# EAGLE board ESP12E Breakout Adapter (EAGLE 7.2.0)
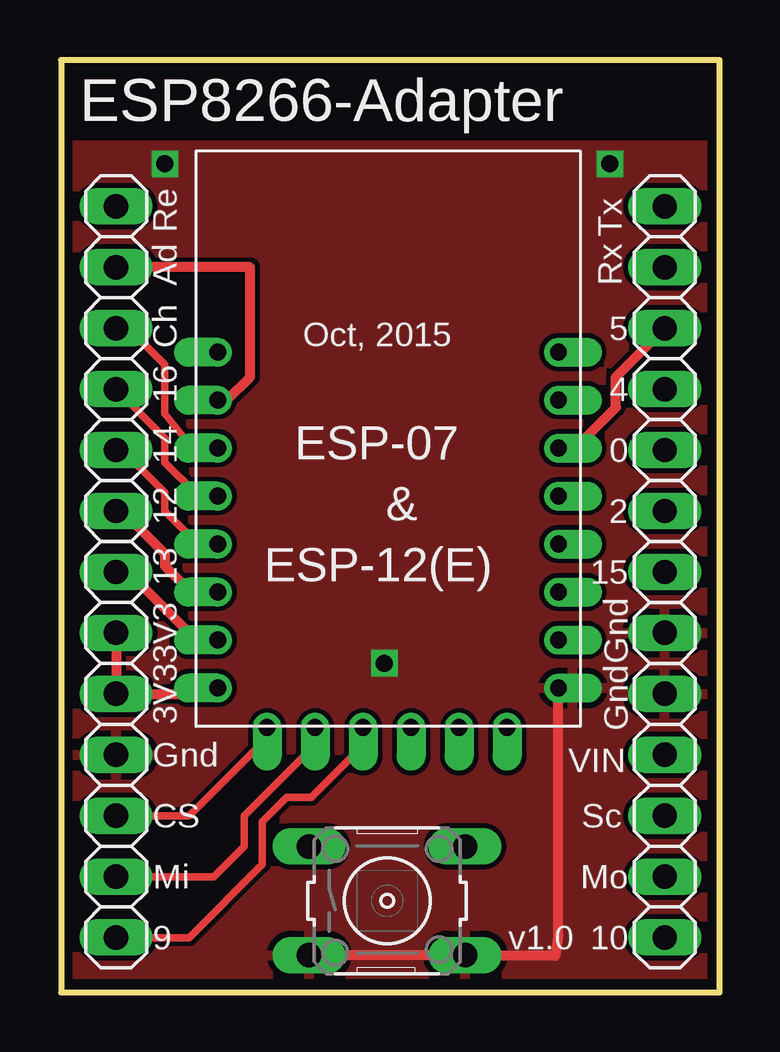
[diagram p0: board, top side]
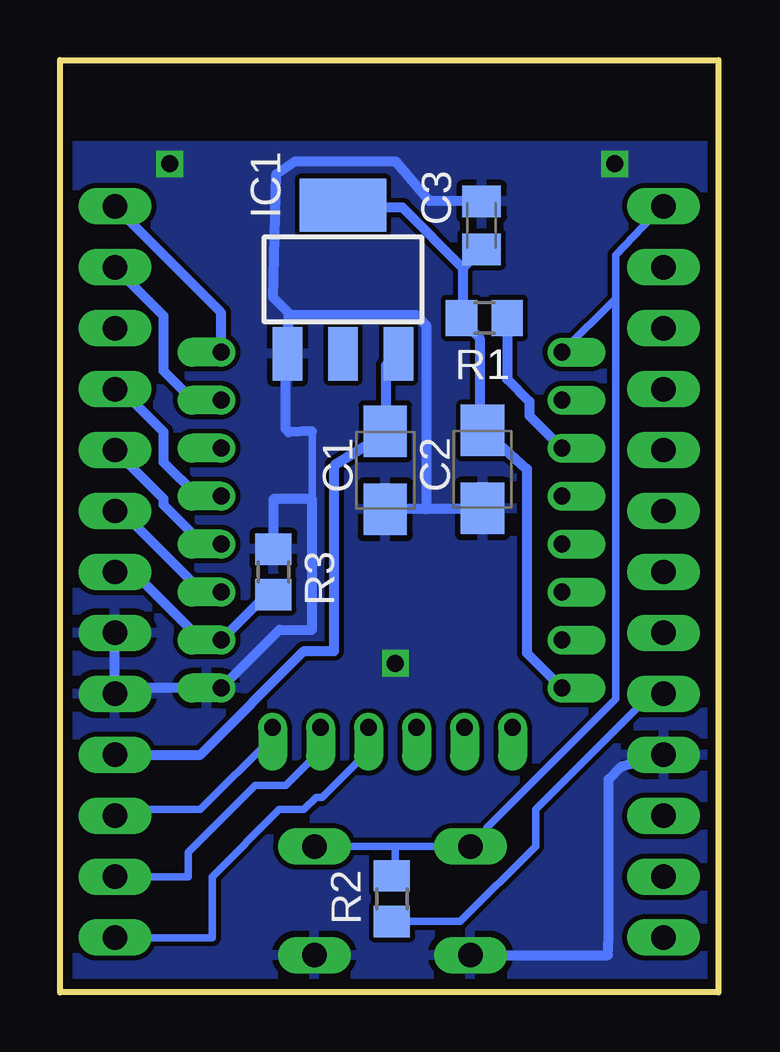
[diagram p1: board, bottom side, seen from below]

Size 27.48 x 38.83 mm. Coordinates in mm from the lower left corner, seen from the top.
Outline: 0,0 27.48,0 27.48,38.83 0,38.83 0,0
Copper layers (1*16): Top 0.035mm / dielectric 1.5mm / Bottom 0.035mm
Design rules "default *": minimum track width 10mil, minimum drill 24mil, track to track 8mil, track to pad 8mil, pad to pad 8mil, via to via 8mil, smd to smd 8mil, copper to edge 20mil, drill to drill 8mil, minimum pad ring 10mil, minimum via ring 8mil, stop-mask expansion 4mil, vias tented up to drill 0mil, thermal gap 10mil
Net classes: 1 a: width 0.203 mm, drill 0.305 mm, clearance 0.203 mm
Milling: 4 lines

## Footprints (pad centres in the part's own frame; a part is rotated, then mirrored left to right if it is on the bottom)
B/3528-21W = smd 2.15 x 1.8: + 1.625,0; - -1.625,0
C0805K = smd 1.3 x 1.6: 1 -1,0; 2 1,0
ESP-12-E = drill 0.7 offset: ADC -7.2,3.8; CH_PD -7.2,1.8; CS0 -5.14,-9.838; GND 7,-8.2; GPIO0 7,-2.2; GPIO2 7,-4.2; GPIO4 7,1.8; GPIO5 7,-0.2; GPIO9 -1.14,-9.838; GPIO10 0.86,-9.838; GPIO12 -7.2,-4.2; GPIO13 -7.2,-6.2; GPIO14 -7.2,-2.2; GPIO15 7,-6.2; GPIO16 -7.2,-0.2; MISO -3.14,-9.838; MOSI 2.86,-9.838; RESET -7.2,5.8; RX 7,3.8; SCLK 4.86,-9.838; TX 7,5.8; VCC -7.2,-8.2
SOT223 = smd 1.219 x 2.235: 1 -2.311,-3.099; 2 0,-3.099; 3 2.311,-3.099 | smd 3.6 x 2.2: TAB 0,3.099
1X13 = drill 1.016 long: 1 -15.24,0; 2 -12.7,0; 3 -10.16,0; 4 -7.62,0; 5 -5.08,0; 6 -2.54,0; 7 0,0; 8 2.54,0; 9 5.08,0; 10 7.62,0; 11 10.16,0; 12 12.7,0; 13 15.24,0
R0805 = smd 1.3 x 1.5: 1 -0.95,0; 2 0.95,0
B3F-10XX = drill 1.016 long: 1 -3.251,2.261; 2 3.251,2.261; 3 -3.251,-2.261; 4 3.251,-2.261

## Placement (x,y rotation side)
C1  10µF  [B/3528-21W]  13.93,21.73 90 bottom
C2  10µF  [B/3528-21W]  9.88,21.77 90 bottom
C3  100nF  [C0805K]  9.92,31.94 90 bottom
ESP8266  ESP-07 & 12(E)  [ESP-12-E]  13.77,20.85 0 top
IC1  LM1117-3.3  [SOT223]  15.69,29.69 0 bottom
JP3  [1X13]  2.34,17.49 270 top
JP4  [1X13]  25.2,17.49 270 top
R1  0 Ohm  [R0805]  9.8,28.08 0 bottom
R2  10KOhm  [R0805]  13.66,3.87 270 bottom
R3  10KOhm  [R0805]  18.59,17.49 270 bottom
RESET_SWITCH  RESET  [B3F-10XX]  13.63,3.78 0 top

## Library data of the parts
C1-C3 R1-R3 = rcl
ESP8266 = johs_esp8266_lib_frank_esp12e_mod; DIMENSIONS: 24.0 x 16.0 mm; PINS: 22; PITCH: 0.078" / 2 mm
IC1 = lm1117
JP3 JP4 = pinhead
RESET_SWITCH = switch-omron; MPN: B3F-1000; OC_FARNELL: 176432; OC_NEWARK: 36M3542

## Nets
ADC: ESP8266.ADC JP3.2
CH_PD: ESP8266.CH_PD JP3.3 R1.2
CS0: ESP8266.CS0 JP3.11
GND [a]: C1.- C2.- C3.2 ESP8266.GND IC1.1 JP3.10 JP4.8 JP4.9 R3.1 RESET_SWITCH.3 RESET_SWITCH.4
GPIO0: ESP8266.GPIO0 JP4.5
GPIO2: ESP8266.GPIO2 JP4.6
GPIO4: ESP8266.GPIO5 JP4.4
GPIO5: ESP8266.GPIO4 JP4.3
GPIO9: ESP8266.GPIO9 JP3.13
GPIO10: ESP8266.GPIO10 JP4.13
GPIO12: ESP8266.GPIO12 JP3.6
GPIO13: ESP8266.GPIO13 JP3.7
GPIO14: ESP8266.GPIO14 JP3.5
GPIO15: ESP8266.GPIO15 JP4.7 R3.2
GPIO16: ESP8266.GPIO16 JP3.4
MISO: ESP8266.MISO JP3.12
MOSI: ESP8266.MOSI JP4.12
RESET: ESP8266.RESET JP3.1 R2.1 RESET_SWITCH.1 RESET_SWITCH.2
RX: ESP8266.RX JP4.2
SCLK: ESP8266.SCLK JP4.11
TX: ESP8266.TX JP4.1
VCC: C2.+ C3.1 ESP8266.VCC IC1.TAB JP3.8 JP3.9 R1.1 R2.2
VIN: C1.+ IC1.3 JP4.10

## Tracks (layer width: path | path; a pad name or v marks a point on that pad's centre or on a via)
ADC
  Top 0.406: ESP8266.ADC 6.96,24.65 7.93,25.62 7.93,30.19 JP3.2
CH_PD
  Top 0.305: JP3.3 2.84,27.65 4.37,26.13 4.37,24.09 5.39,22.82 6.4,22.82 ESP8266.CH_PD
  Bottom 0.406: R1.2 8.85,25.53 7.93,24.6 7.93,24.01 ESP8266.CH_PD
CS0
  Top 0.305: ESP8266.CS0 8.63,10.57 5.39,7.33 JP3.11
GND  (via drill 0.7)
  Top 0.406: RESET_SWITCH.3 RESET_SWITCH.4 17.17,1.49 20.63,1.49 20.75,2.38 20.75,12.63 ESP8266.GND
  Bottom 0.305: 16.98,20.52 16.98,23.36
  Bottom 0.406: 12.23,20.11 10.41,20.11 10,20.52 C2.- | 12.23,20.11 13.91,20.11 C1.- | 18.1,23.46 18.1,26.53 IC1.1 17.96,26.67 17.96,28.21 | 17.96,28.21 17.96,28.28 18.59,28.92 18.47,34.08 17.68,34.61 13.51,34.61 12.12,32.96 10,32.96 C3.2 | 12.23,20.11 12.23,27.79 12.65,28.21 17.96,28.21 | 16.98,23.36 17.96,23.32 | JP3.10 4.11,9.36 4.62,8.85 4.62,2.25 4.66,1.52 RESET_SWITCH.3 | JP4.8 JP4.9 24.96,12.65 ESP8266.GND 18.34,15.08 16.98,15.08 16.98,20.52 18.59,20.52 R3.1
  other vias: 13.51,13.68 4.37,34.51 22.91,34.51
  pour Top: 0.31,0.22 27.23,0.22 27.23,35.27 0.31,35.27
  pour Bottom: 0.31,0.22 27.23,0.22 27.23,35.27 0.31,35.27
GPIO0
  Bottom 0.406: ESP8266.GPIO0 21.53,18.65 23.17,20.28 23.17,20.54 JP4.5
GPIO2
  Bottom 0.406: ESP8266.GPIO2 21.56,16.65 24.44,19.52 24.69,19.52 JP4.6
GPIO4
  Bottom 0.406: ESP8266.GPIO5 21.75,20.65 23.17,22.06 23.17,23.33 24.44,24.6 24.69,24.6 JP4.4
GPIO5
  Top 0.406: ESP8266.GPIO4 21.47,22.65 23.17,24.35 23.17,25.62 JP4.3
GPIO9
  Top 0.305: ESP8266.GPIO9 12.63,10.26 10.47,8.09 9.45,8.09 8.43,7.08 8.43,5.3 5.39,2.25 JP3.13
GPIO10
  Bottom 0.305: ESP8266.GPIO10 14.63,10.02 16.56,8.09 16.82,8.09 17.32,7.58 18.34,7.58 21.13,4.79 21.13,2.25 JP4.13
GPIO12
  Top 0.406: JP3.6 2.59,20.03 4.37,18.25 4.37,17.74 5.39,16.73 6.49,16.73 ESP8266.GPIO12
GPIO13
  Top 0.406: JP3.7 2.84,17.49 5.64,14.7 6.52,14.7 ESP8266.GPIO13
GPIO14
  Top 0.305: JP3.5 2.59,22.57 4.37,20.79 4.37,20.03 5.64,18.76 6.46,18.76 ESP8266.GPIO14
GPIO15
  Bottom 0.406: JP4.7 24.94,17.24 24.18,17.24 21.6,14.65 ESP8266.GPIO15 19.13,16.29 R3.2
GPIO16
  Top 0.305: JP3.4 4.37,23.08 4.37,22.06 5.64,20.79 6.43,20.79 ESP8266.GPIO16
MISO
  Top 0.305: ESP8266.MISO 10.63,10.29 7.67,7.33 7.67,6.06 6.4,4.79 JP3.12
MOSI
  Bottom 0.305: ESP8266.MOSI 16.63,10.06 18.09,8.6 19.36,8.6 22.15,5.81 22.15,4.79 JP4.12
RESET
  Bottom 0.305: 2.45,32.68 4.33,30.71 4.33,28.89 | 4.33,28.89 4.33,12.2 9.7,6.82 9.7,6.72 RESET_SWITCH.1 RESET_SWITCH.2 13.53,6.04 13.51,6.06 13.51,4.96 R2.1 | 4.33,28.89 ESP8266.RESET
  Bottom 0.406: 2.45,32.68 JP3.1
RX
  Bottom 0.406: ESP8266.RX 21.94,24.65 23.17,25.87 23.17,28.16 JP4.2
SCLK
  Bottom 0.305: ESP8266.SCLK 18.63,10.6 21.64,7.58 24.95,7.58 JP4.11
TX
  Bottom 0.406: ESP8266.TX 20.77,28.3 JP4.1
VCC
  Top 0.406: JP3.8 JP3.9 6.33,12.41 ESP8266.VCC
  Bottom 0.305: R2.2 10.81,2.92 7.67,6.06 7.67,7.59 2.85,12.41 JP3.9
  Bottom 0.406: 10.69,30.16 10.69,28.21 R1.1 10.69,27.93 10,27.23 10,24.02 C2.+ 9.86,23.74 9.86,23.43 8.03,21.78 8.03,14.11 ESP8266.VCC | 10.69,30.16 10,30.86 C3.1 | 10.69,30.16 13.21,32.68 15.58,32.68 IC1.TAB
VIN
  Bottom 0.406: IC1.3 13.49,26.53 13.91,26.11 13.91,23.46 C1.+ 14.05,23.18 16.07,21.92 16.07,14.19 17.32,14.19 21.64,9.87 JP4.10

## Text on the board
tPlace: ESP8266-Adapter | Re | Ad | Tx | Rx | Ch | Oct, 2015 | 5 | 16 | 4 | 14 | 0 | 12 | 2 | 13 | 15 | 3V3 | Gnd | 3V3 | Gnd | VIN | Gnd | Sc | CS | Mo | Mi | v1.0 | 10 | 9